# EAGLE board Main_DMB-4773-opto-C (EAGLE 6.5.0)
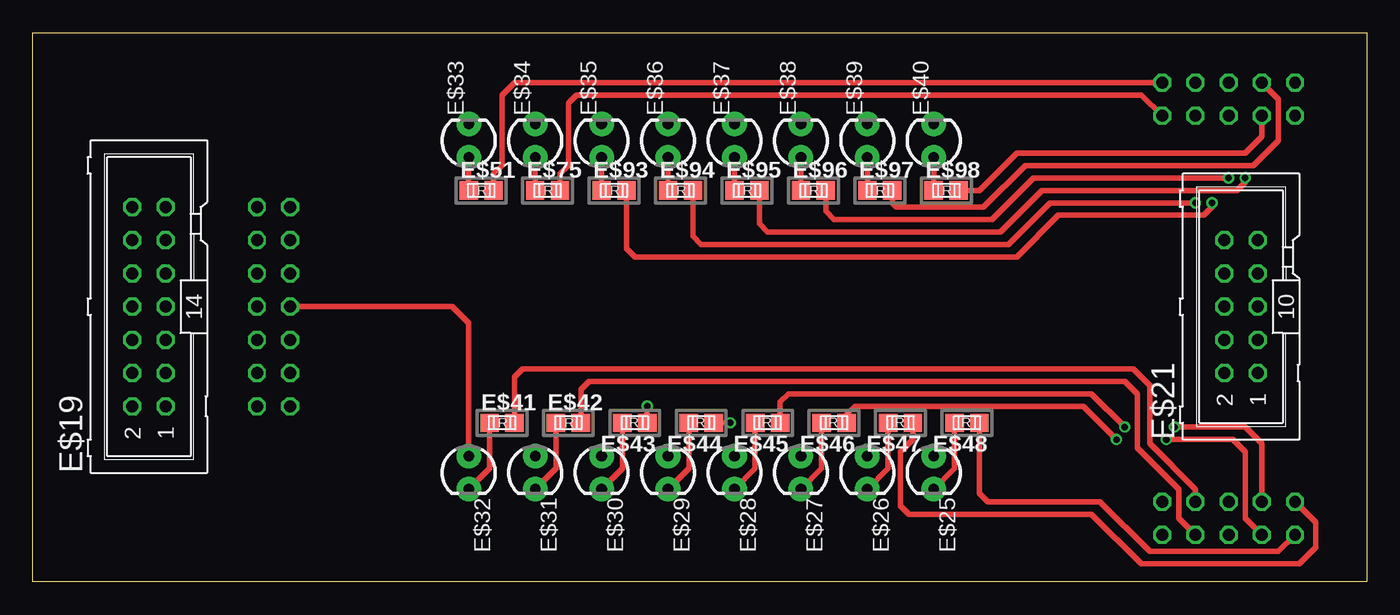
[diagram p0: board, top side]
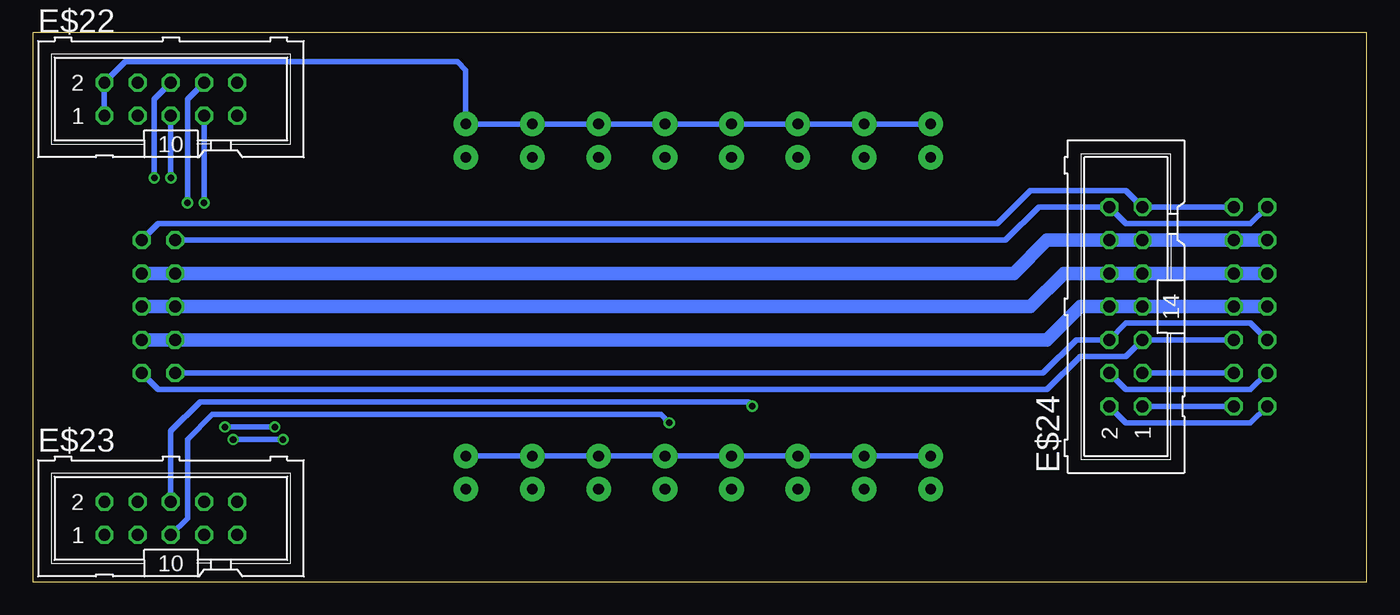
[diagram p1: board, bottom side, seen from below]

Size 102.01 x 42.01 mm. Coordinates in mm from the lower left corner, seen from the top.
Outline: 0,42.01 102.01,42.01 102.01,0 0,0 0,42.01
Copper layers (1*16): Top 0.0356mm / dielectric 1.5011mm / Bottom 0.0356mm
Design rules "LaenPCBOrder": minimum track width 6mil, minimum drill 13mil, track to track 6mil, track to pad 6mil, pad to pad 6mil, via to via 6mil, smd to smd 6mil, copper to edge 15mil, drill to drill 6mil, minimum pad ring 7mil, minimum via ring 7mil, stop-mask expansion 3mil, vias tented up to drill 0mil, thermal gap 10mil

## Footprints (pad centres in the part's own frame; a part is rotated, then mirrored left to right if it is on the bottom)
ML14 = drill 0.914 octagon: 1 -7.62,-1.27; 2 -7.62,1.27; 3 -5.08,-1.27; 4 -5.08,1.27; 5 -2.54,-1.27; 6 -2.54,1.27; 7 0,-1.27; 8 0,1.27; 9 2.54,-1.27; 10 2.54,1.27; 11 5.08,-1.27; 12 5.08,1.27; 13 7.62,-1.27; 14 7.62,1.27
ML10 = drill 0.914 octagon: 1 -5.08,-1.27; 2 -5.08,1.27; 3 -2.54,-1.27; 4 -2.54,1.27; 5 0,-1.27; 6 0,1.27; 7 2.54,-1.27; 8 2.54,1.27; 9 5.08,-1.27; 10 5.08,1.27
LED3MM = drill 0.813 pad 1.88: A -1.27,0; K 1.27,0
R0805 = smd 1.397 x 1.397: 1 -0.953,0; 2 0.953,0

## Placement (x,y rotation side)
E$19  [ML14]  8.89,21.06 90 top
E$21  [ML10]  92.39,21.06 90 top
E$22  [ML10]  91.44,36.93 0 bottom
E$23  [ML10]  91.44,4.86 0 bottom
E$24  [ML14]  18.41,21.06 90 bottom
E$25  [LED3MM]  68.9,8.36 270 top
E$26  [LED3MM]  63.82,8.36 270 top
E$27  [LED3MM]  58.74,8.36 270 top
E$28  [LED3MM]  53.66,8.36 270 top
E$29  [LED3MM]  48.58,8.36 270 top
E$30  [LED3MM]  43.5,8.36 270 top
E$31  [LED3MM]  38.42,8.36 270 top
E$32  [LED3MM]  33.34,8.36 270 top
E$33  [LED3MM]  33.34,33.76 90 top
E$34  [LED3MM]  38.42,33.76 90 top
E$35  [LED3MM]  43.5,33.76 90 top
E$36  [LED3MM]  48.58,33.76 90 top
E$37  [LED3MM]  53.66,33.76 90 top
E$38  [LED3MM]  58.74,33.76 90 top
E$39  [LED3MM]  63.82,33.76 90 top
E$40  [LED3MM]  68.9,33.76 90 top
E$41  470  [R0805]  35.88,12.17 0 top
E$42  470  [R0805]  40.96,12.17 0 top
E$43  470  [R0805]  46.04,12.17 180 top
E$44  470  [R0805]  51.12,12.17 180 top
E$45  470  [R0805]  56.2,12.17 180 top
E$46  470  [R0805]  61.28,12.17 180 top
E$47  470  [R0805]  66.36,12.17 180 top
E$48  470  [R0805]  71.44,12.17 180 top
E$51  470  [R0805]  34.29,29.95 0 top
E$75  470  [R0805]  39.37,29.95 0 top
E$93  470  [R0805]  44.45,29.95 0 top
E$94  470  [R0805]  49.53,29.95 0 top
E$95  470  [R0805]  54.61,29.95 0 top
E$96  470  [R0805]  59.69,29.95 0 top
E$97  470  [R0805]  64.77,29.95 0 top
E$98  470  [R0805]  69.85,29.95 0 top

## Library data of the parts
E$19 E$21-E$24 = con-harting-ml
E$25-E$40 = SparkFun-LED
E$41-E$48 E$51 E$75 E$93-E$98 = divers

## Nets
S$86: E$19.11 E$19.12 E$21.7 E$21.8 E$24.11 E$24.12
S$88: E$19.9 E$19.10 E$21.5 E$21.6 E$24.9 E$24.10
S$90: E$19.6 E$21.2 E$24.6
S$91: E$19.5 E$21.1 E$24.5
S$92: E$19.4 E$24.4
S$93: E$19.3 E$24.3
S$94: E$19.2 E$24.2
S$95: E$19.1 E$24.1
S$96: E$23.4 E$45.1
S$97: E$19.7 E$19.8 E$21.3 E$21.4 E$24.7 E$24.8 E$25.A E$26.A E$27.A E$28.A E$29.A E$30.A E$31.A E$32.A
S$98: E$32.K E$41.1
S$100: E$23.8 E$41.2
S$103: E$31.K E$42.1
S$104: E$23.7 E$42.2
S$106: E$30.K E$43.2
S$107: E$29.K E$44.2
S$109: E$23.6 E$43.1
S$110: E$23.5 E$44.1
S$111: E$23.3 E$46.1
S$112: E$23.2 E$47.1
S$113: E$23.1 E$48.1
S$115: E$28.K E$45.2
S$117: E$27.K E$46.2
S$118: E$26.K E$47.2
S$121: E$25.K E$48.2
S$122: E$22.10 E$51.2
S$123: E$22.9 E$75.2
S$124: E$22.8 E$93.2
S$125: E$22.7 E$94.2
S$127: E$22.6 E$95.2
S$128: E$22.5 E$96.2
S$129: E$22.4 E$97.2
S$130: E$22.3 E$98.2
S$131: E$22.1 E$22.2 E$33.K E$34.K E$35.K E$36.K E$37.K E$38.K E$39.K E$40.K
S$135: E$33.A E$51.1
S$136: E$34.A E$75.1
S$137: E$35.A E$93.1
S$138: E$36.A E$94.1
S$139: E$37.A E$95.1
S$140: E$38.A E$96.1
S$142: E$39.A E$97.1
S$144: E$40.A E$98.1
SCL: E$19.14 E$21.10 E$24.14
SDA: E$19.13 E$21.9 E$24.13

## Tracks (layer width: path | path; a pad name or v marks a point on that pad's centre or on a via)
S$86
  Bottom 1.016: E$19.12 E$19.11 E$24.11 E$24.12 24.45,26.14 26.99,23.6 E$21.8 E$21.7
S$88
  Bottom 1.016: E$21.5 E$21.6 25.72,21.06 23.18,23.6 E$24.10 E$24.9 E$19.9 E$19.10
S$90
  Bottom 0.406: E$19.6 8.89,19.79 18.41,19.79 E$24.6 22.23,18.52 24.77,15.98 E$21.2
S$91
  Bottom 0.406: E$19.5 E$24.5 18.41,17.25 21.91,17.25 24.45,14.71 92.39,14.71 E$21.1
S$92
  Bottom 0.406: E$24.4 18.41,14.71 8.89,14.71 E$19.4
S$93
  Bottom 0.406: E$19.3 E$24.3
S$94
  Bottom 0.406: E$24.2 18.41,12.17 8.89,12.17 E$19.2
S$95
  Bottom 0.406: E$19.1 E$24.1
S$96  (via drill 0.5)
  Top 0.406: E$45.1 57.15,13.75 57.78,14.39 80.96,14.39 v83.5,11.85 | v87.31,11.85 92.71,11.85 93.98,10.58 E$23.4
  Bottom 0.406: v83.5,11.85 v87.31,11.85
S$97
  Top 0.406: E$24.8 32.07,21.06 33.34,19.79 E$32.A
  Bottom 0.406: E$25.A E$26.A E$27.A E$28.A E$29.A E$30.A E$31.A E$32.A
  Bottom 1.016: E$19.8 E$19.7 E$24.7 E$24.8 21.91,21.06 24.45,18.52 E$21.4 E$21.3
S$98
  Top 0.406: E$32.K 34.92,8.67 E$41.1
S$100
  Top 0.406: E$41.2 36.83,15.66 37.47,16.29 84.14,16.29 85.41,15.02 85.41,10.58 88.9,7.09 E$23.8
S$103
  Top 0.406: E$31.K 40.01,8.67 E$42.1
S$104
  Top 0.406: E$23.7 87.63,4.86 87.63,7.09 84.45,10.26 84.45,14.39 83.5,15.34 42.55,15.34 41.91,14.71 E$42.2
S$106
  Top 0.406: E$43.2 45.09,8.67 E$30.K
S$107
  Top 0.406: E$44.2 50.16,8.67 E$29.K
S$109  (via drill 0.5)
  Top 0.406: v46.99,13.44 E$43.1 | E$43.1
  Bottom 0.406: E$23.6 91.44,11.53 89.22,13.75 47.31,13.75 v46.99,13.44
S$110  (via drill 0.5)
  Top 0.406: E$44.1 52.39,12.17 E$44.1 | E$44.1 v53.34,12.17
  Bottom 0.406: v53.34,12.17 53.98,12.8 88.27,12.8 90.17,10.9 90.17,4.86 E$23.5
S$111  (via drill 0.5)
  Top 0.406: E$46.1 62.23,12.8 62.87,13.44 80.33,13.44 v82.87,10.9 | v86.68,10.9 91.76,10.9 92.71,9.94 92.71,4.86 E$23.3
  Bottom 0.406: v82.87,10.9 v86.68,10.9
S$112
  Top 0.406: E$47.1 67.31,10.9 66.36,9.94 66.36,5.82 66.99,5.18 80.96,5.18 84.77,1.37 96.84,1.37 98.11,2.64 98.11,4.55 E$23.2
S$113
  Top 0.406: E$48.1 72.39,6.77 73.03,6.13 81.6,6.13 85.41,2.32 95.25,2.32 E$23.1
S$115
  Top 0.406: E$28.K 55.24,8.67 E$45.2
S$117
  Top 0.406: E$27.K 60.33,8.67 E$46.2
S$118
  Top 0.406: E$26.K 65.41,8.67 E$47.2
S$121
  Top 0.406: E$25.K 70.48,8.67 E$48.2
S$122
  Top 0.406: E$22.10 36.83,38.2 35.88,37.25 35.88,31.85 35.24,31.22 E$51.2
S$123
  Top 0.406: E$75.2 40.32,31.22 40.96,31.85 40.96,36.61 41.59,37.25 84.77,37.25 E$22.9
S$124  (via drill 0.5)
  Top 0.406: E$93.2 45.4,25.5 46.04,24.87 75.25,24.87 78.42,28.04 89.53,28.04 90.17,28.68 v90.17,28.99
  Bottom 0.406: E$22.8 90.17,36.93 v90.17,28.99
S$125  (via drill 0.5)
  Top 0.406: v88.9,28.99 77.79,28.99 74.61,25.82 51.12,25.82 50.48,26.45 E$94.2
  Bottom 0.406: E$22.7 v88.9,28.99
S$127  (via drill 0.5)
  Top 0.406: E$95.2 55.56,27.41 56.2,26.77 73.98,26.77 77.15,29.95 92.08,29.95 92.71,30.58 v92.71,30.9
  Bottom 0.406: E$22.6 92.71,36.93 v92.71,30.9
S$128  (via drill 0.5)
  Top 0.406: E$96.2 60.64,28.36 61.28,27.72 73.34,27.72 76.52,30.9 v91.44,30.9
  Bottom 0.406: E$22.5 v91.44,30.9
S$129
  Top 0.406: E$22.4 95.25,36.93 95.25,33.76 93.34,31.85 75.88,31.85 72.71,28.68 66.04,28.68 65.72,28.99 E$97.2
S$130
  Top 0.406: E$98.2 72.39,29.95 75.25,32.8 92.71,32.8 93.98,34.07 E$22.3
S$131
  Bottom 0.406: E$33.K E$34.K E$35.K E$36.K E$37.K E$38.K E$39.K E$40.K 68.9,39.15 69.53,39.79 94.93,39.79 E$22.2 E$22.1
S$135
  Top 0.406: E$33.A E$51.1
S$136
  Top 0.406: E$75.1 E$34.A
S$137
  Top 0.406: E$35.A E$93.1
S$138
  Top 0.406: E$94.1 E$36.A
S$139
  Top 0.406: E$95.1 E$37.A
S$140
  Top 0.406: E$96.1 E$38.A
S$142
  Top 0.406: E$97.1 E$39.A
S$144
  Top 0.406: E$98.1 E$40.A
SCL
  Bottom 0.406: E$19.14 8.89,27.41 18.41,27.41 E$24.14 25.08,28.68 27.62,26.14 E$21.10
SDA
  Bottom 0.406: E$21.9 92.39,27.41 28.26,27.41 25.72,29.95 18.41,29.95 E$24.13 E$19.13

## Text on the board
tDocu: Inputs | RTD1 | RTD2 | RTD3 | RTD4 | 1 | 2 | 3 | 4 | 5 | 6 | 7 | 8 | GND | PWM1 | PWM2 | PWM3 | PWM4 | POWER | 1 | 2 | 3 | 4 | 5 | 6 | 7 | 8